# Altium PCB PCB2.PcbDoc
Units mm, origin at the board's own origin, x right, y up, seen from the top; angles counter-clockwise.
Board outline 347.66 x 123.82 mm, 2 copper layers (Top Layer, Bottom Layer), stack 1.671 mm thick; 182 components, 114 nets, 863 pads, 116 vias.
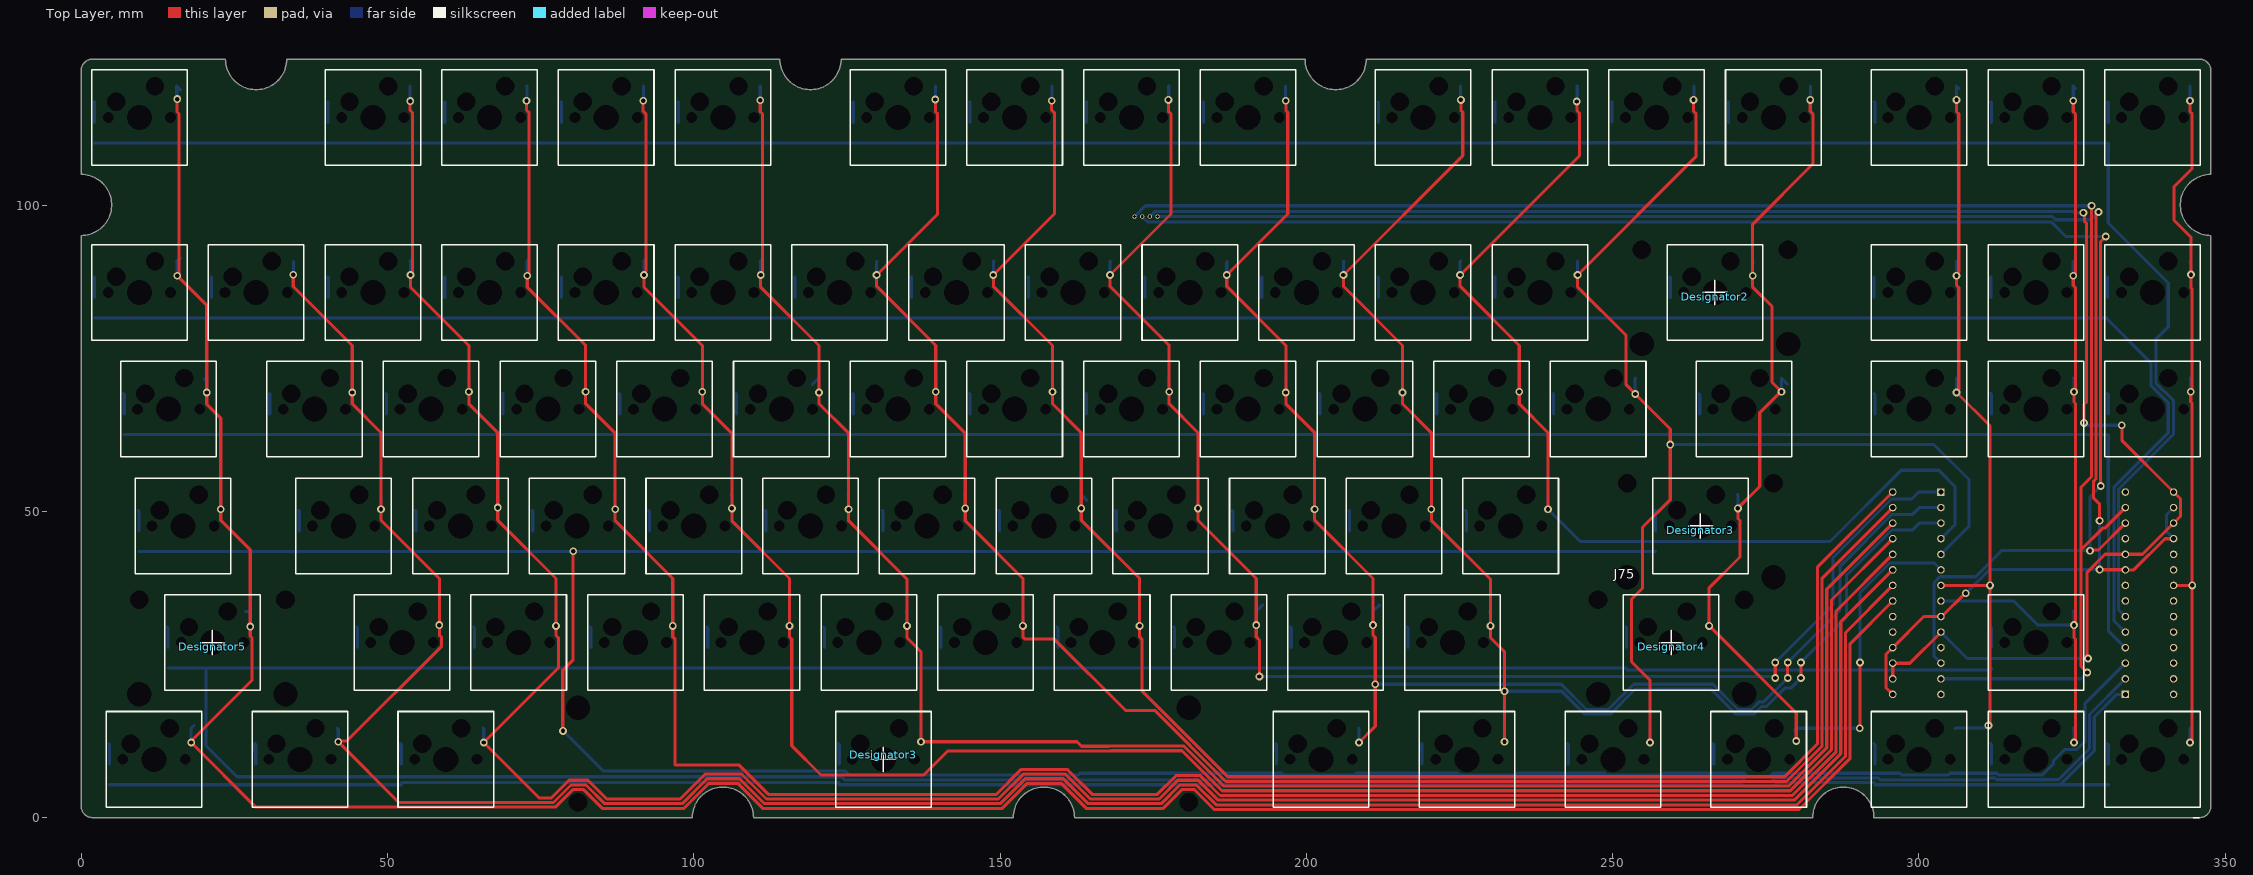
[diagram p0: Top Layer view]
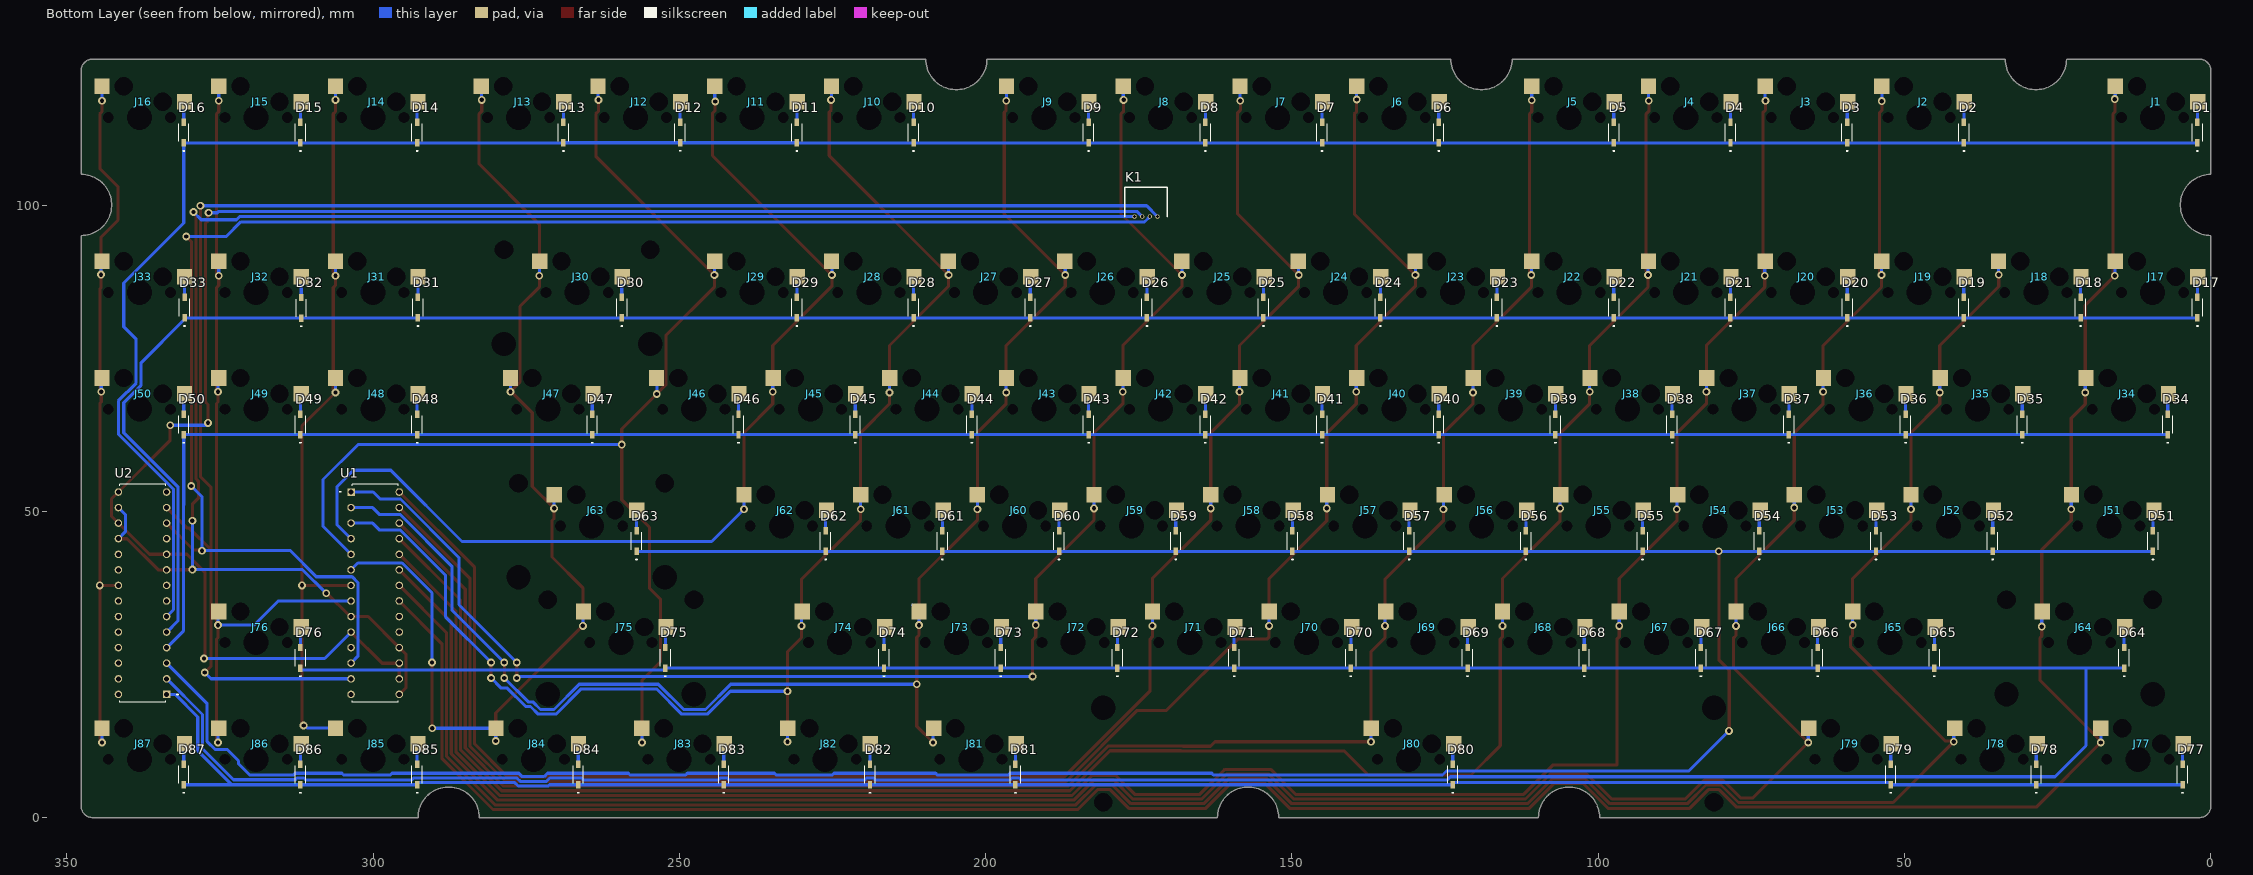
[diagram p1: Bottom Layer view, seen from below]
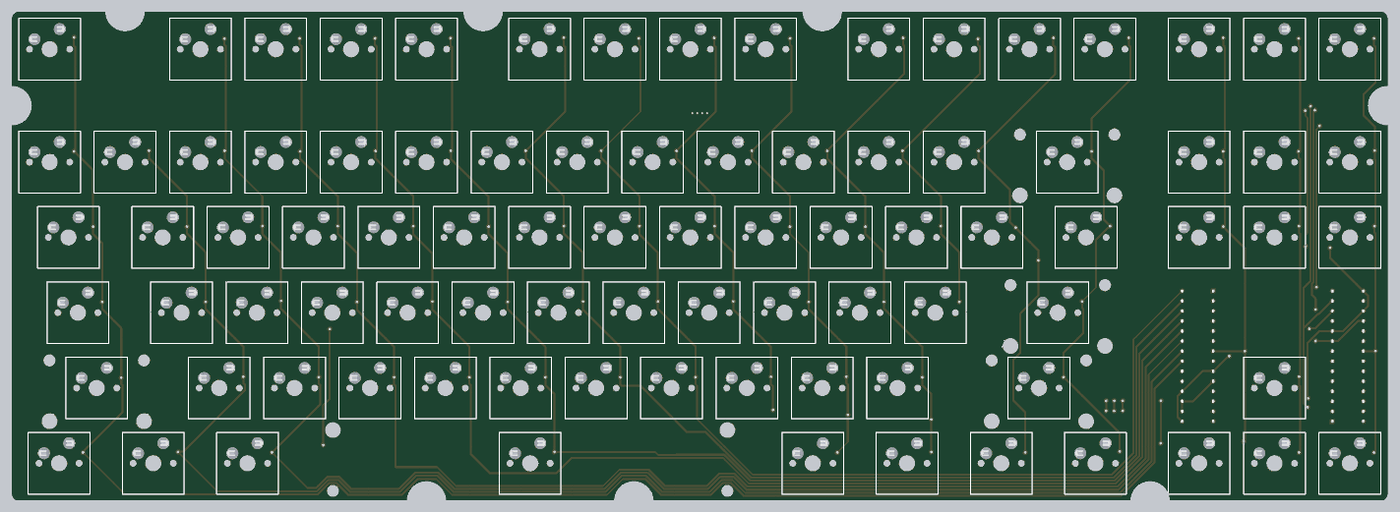
[diagram p2: 3D render of the assembled board from above, using the file's embedded part models]
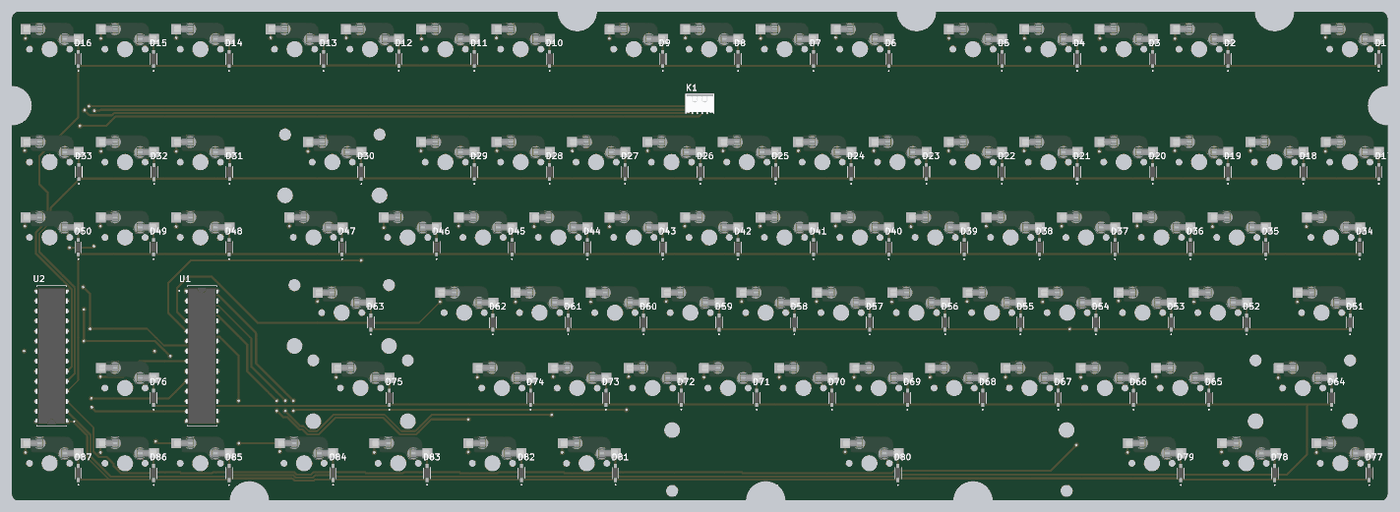
[diagram p3: 3D render of the assembled board from below, using the file's embedded part models]

## Layer stack, top to bottom
Top Solder: solder mask 0.0102, Solder Resist, Dk 3.5
Top Layer: signal copper 0.0356
Dielectric 1: dielectric 1.6, FR-4, Dk 4.8
Bottom Layer: signal copper 0.0356
Bottom Solder: solder mask 0.0102, Solder Resist, Dk 3.5

## Board outline
0,1.905 ccw(c1.905,1.905) 1.905,0 99.775,0 cw(c104.775,0) 109.775,0 152.162,0 cw(c157.162,0) 162.163,0 282.655,0 cw(c287.655,0) 292.655,0 345.757,0 ccw(c345.757,1.905) 347.662,1.905 347.662,95.012 cw(c347.662,100.013) 347.662,105.013 347.662,121.92 ccw(c345.757,121.92) 345.757,123.825 209.788,123.825 cw(c204.788,123.825) 199.787,123.825 124.063,123.825 cw(c119.062,123.825) 114.062,123.825 33.575,123.825 cw(c28.575,123.825) 23.575,123.825 1.905,123.825 ccw(c1.905,121.92) 0,121.92 0,105.013 cw(c0,100.013) 0,95.012

## Design rules (kind name [scope] priority, off if disabled: settings)
Clearance [All] p1: gap=0.254 ignorepadtopadclearanceinfootprint=FALSE except(0: Arc-Hole Track-Hole SMDPad-Hole THPad-Hole Via-Hole Fill-Hole Poly-Hole Region-Hole Text-Hole)
HoleSize [All] p1: absolutevalues=TRUE maxlimit=5 minlimit=0.025 maxpercent=80.000 minpercent=20.000
PolygonConnect [All] p1: connectstyle=Relief reliefconductorwidth=0.254 reliefentries=4 polygonreliefangle="90 Angle" airgapwidth=0.254
RoutingVias [All] p1: holewidth=0.3 width=0.6 viastyle="Through Hole" minholewidth=0.3 minwidth=0.6 maxholewidth=0.3 maxwidth=0.6
SolderMaskExpansion [All] p1: expansion=0.102 istentingtop=TRUE
Width [All] p1: maxlimit=0.762 minlimit=0.152 preferedwidth=0.508
29 further rules are at their usual default settings.

## Components (designator, comment, footprint, x,y, rotation, side; value= is the part's Value field where it differs from the comment)
D1 "1N5819HW-7-F" SOD3715X145N 2.222,111.823 r90 bottom
D2 "1N5819HW-7-F" SOD3715X145N 40.322,111.823 r90 bottom
D3 "1N5819HW-7-F" SOD3715X145N 59.372,111.823 r90 bottom
D4 "1N5819HW-7-F" SOD3715X145N 78.422,111.823 r90 bottom
D5 "1N5819HW-7-F" SOD3715X145N 97.472,111.823 r90 bottom
D6 "1N5819HW-7-F" SOD3715X145N 126.047,111.823 r90 bottom
D7 "1N5819HW-7-F" SOD3715X145N 145.097,111.823 r90 bottom
D8 "1N5819HW-7-F" SOD3715X145N 164.147,111.823 r90 bottom
D9 "1N5819HW-7-F" SOD3715X145N 183.197,111.823 r90 bottom
D10 "1N5819HW-7-F" SOD3715X145N 211.772,111.823 r90 bottom
D11 "1N5819HW-7-F" SOD3715X145N 230.822,111.823 r90 bottom
D12 "1N5819HW-7-F" SOD3715X145N 249.872,111.852 r90 bottom
D13 "1N5819HW-7-F" SOD3715X145N 268.922,111.823 r90 bottom
D14 "1N5819HW-7-F" SOD3715X145N 292.798,111.823 r90 bottom
D15 "1N5819HW-7-F" SOD3715X145N 311.848,111.823 r90 bottom
D16 "1N5819HW-7-F" SOD3715X145N 330.898,111.823 r90 bottom
D17 "1N5819HW-7-F" SOD3715X145N 2.202,83.248 r90 bottom
D18 "1N5819HW-7-F" SOD3715X145N 21.272,83.248 r90 bottom
D19 "1N5819HW-7-F" SOD3715X145N 40.354,83.248 r90 bottom
D20 "1N5819HW-7-F" SOD3715X145N 59.358,83.248 r90 bottom
D21 "1N5819HW-7-F" SOD3715X145N 78.432,83.248 r90 bottom
D22 "1N5819HW-7-F" SOD3715X145N 97.472,83.248 r90 bottom
D23 "1N5819HW-7-F" SOD3715X145N 116.561,83.248 r90 bottom
D24 "1N5819HW-7-F" SOD3715X145N 135.579,83.248 r90 bottom
D25 "1N5819HW-7-F" SOD3715X145N 154.665,83.248 r90 bottom
D26 "1N5819HW-7-F" SOD3715X145N 173.672,83.248 r90 bottom
D27 "1N5819HW-7-F" SOD3715X145N 192.722,83.248 r90 bottom
D28 "1N5819HW-7-F" SOD3715X145N 211.772,83.248 r90 bottom
D29 "1N5819HW-7-F" SOD3715X145N 230.822,83.248 r90 bottom
D30 "1N5819HW-7-F" SOD3715X145N 259.397,83.248 r90 bottom
D31 "1N5819HW-7-F" SOD3715X145N 292.671,83.248 r90 bottom
D32 "1N5819HW-7-F" SOD3715X145N 311.721,83.219 r90 bottom
D33 "1N5819HW-7-F" SOD3715X145N 330.771,83.248 r90 bottom
D34 "1N5819HW-7-F" SOD3715X145N 7.048,64.198 r90 bottom
D35 "1N5819HW-7-F" SOD3715X145N 30.797,64.198 r90 bottom
D36 "1N5819HW-7-F" SOD3715X145N 49.847,64.198 r90 bottom
D37 "1N5819HW-7-F" SOD3715X145N 68.897,64.198 r90 bottom
D38 "1N5819HW-7-F" SOD3715X145N 87.947,64.198 r90 bottom
D39 "1N5819HW-7-F" SOD3715X145N 106.997,64.198 r90 bottom
D40 "1N5819HW-7-F" SOD3715X145N 126.047,64.198 r90 bottom
D41 "1N5819HW-7-F" SOD3715X145N 145.097,64.198 r90 bottom
D42 "1N5819HW-7-F" SOD3715X145N 164.147,64.198 r90 bottom
D43 "1N5819HW-7-F" SOD3715X145N 183.197,64.198 r90 bottom
D44 "1N5819HW-7-F" SOD3715X145N 202.247,64.198 r90 bottom
D45 "1N5819HW-7-F" SOD3715X145N 221.297,64.198 r90 bottom
D46 "1N5819HW-7-F" SOD3715X145N 240.347,64.198 r90 bottom
D47 "1N5819HW-7-F" SOD3715X145N 264.223,64.198 r90 bottom
D48 "1N5819HW-7-F" SOD3715X145N 292.798,64.198 r90 bottom
D49 "1N5819HW-7-F" SOD3715X145N 311.848,64.198 r90 bottom
D50 "1N5819HW-7-F" SOD3715X145N 330.898,64.198 r90 bottom
D51 "1N5819HW-7-F" SOD3715X145N 9.461,45.148 r90 bottom
D52 "1N5819HW-7-F" SOD3715X145N 35.623,45.148 r90 bottom
D53 "1N5819HW-7-F" SOD3715X145N 54.673,45.148 r90 bottom
D54 "1N5819HW-7-F" SOD3715X145N 73.723,45.148 r90 bottom
D55 "1N5819HW-7-F" SOD3715X145N 92.773,45.148 r90 bottom
D56 "1N5819HW-7-F" SOD3715X145N 111.823,45.148 r90 bottom
D57 "1N5819HW-7-F" SOD3715X145N 130.873,45.148 r90 bottom
D58 "1N5819HW-7-F" SOD3715X145N 149.923,45.148 r90 bottom
D59 "1N5819HW-7-F" SOD3715X145N 168.973,45.148 r90 bottom
D60 "1N5819HW-7-F" SOD3715X145N 188.023,45.148 r90 bottom
D61 "1N5819HW-7-F" SOD3715X145N 207.073,45.148 r90 bottom
D62 "1N5819HW-7-F" SOD3715X145N 226.123,45.148 r90 bottom
D63 "1N5819HW-7-F" SOD3715X145N 256.984,45.148 r90 bottom
D64 "1N5819HW-7-F" SOD3715X145N 14.16,26.098 r90 bottom
D65 "1N5819HW-7-F" SOD3715X145N 45.148,26.098 r90 bottom
D66 "1N5819HW-7-F" SOD3715X145N 64.198,26.098 r90 bottom
D67 "1N5819HW-7-F" SOD3715X145N 83.248,26.098 r90 bottom
D68 "1N5819HW-7-F" SOD3715X145N 102.298,26.098 r90 bottom
D69 "1N5819HW-7-F" SOD3715X145N 121.348,26.098 r90 bottom
D70 "1N5819HW-7-F" SOD3715X145N 140.398,26.098 r90 bottom
D71 "1N5819HW-7-F" SOD3715X145N 159.448,26.098 r90 bottom
D72 "1N5819HW-7-F" SOD3715X145N 178.498,26.098 r90 bottom
D73 "1N5819HW-7-F" SOD3715X145N 197.548,26.098 r90 bottom
D74 "1N5819HW-7-F" SOD3715X145N 216.598,26.098 r90 bottom
D75 "1N5819HW-7-F" SOD3715X145N 252.285,26.098 r90 bottom
D76 "1N5819HW-7-F" SOD3715X145N 311.848,26.098 r90 bottom
D77 "1N5819HW-7-F" SOD3715X145N 4.635,7.048 r90 bottom
D78 "1N5819HW-7-F" SOD3715X145N 28.511,7.048 r90 bottom
D79 "1N5819HW-7-F" SOD3715X145N 52.26,7.048 r90 bottom
D80 "1N5819HW-7-F" SOD3715X145N 123.761,7.048 r90 bottom
D81 "1N5819HW-7-F" SOD3715X145N 195.135,7.048 r90 bottom
D82 "1N5819HW-7-F" SOD3715X145N 218.884,7.048 r90 bottom
D83 "1N5819HW-7-F" SOD3715X145N 242.76,7.048 r90 bottom
D84 "1N5819HW-7-F" SOD3715X145N 266.509,7.048 r90 bottom
D85 "1N5819HW-7-F" SOD3715X145N 292.798,7.048 r90 bottom
D86 "1N5819HW-7-F" SOD3715X145N 311.848,7.048 r90 bottom
D87 "1N5819HW-7-F" SOD3715X145N 330.898,7.048 r90 bottom
Designator2 "Comment" space_bar_stab 266.7,85.725 r0 top
Designator3 "Comment" SPACE_STAB 130.969,9.525 r180 top
Designator3 "Comment" space_bar_stab 264.319,47.625 r0 top
Designator4 "Comment" space_bar_stab 259.556,28.575 r0 top
Designator5 "Comment" space_bar_stab 21.431,28.575 r0 top
J1 "Socket" SOCKET 9.525,114.3 r0 top
J2 "Socket" SOCKET 47.625,114.3 r0 top
J3 "Socket" SOCKET 66.675,114.3 r0 top
J4 "Socket" SOCKET 85.725,114.3 r0 top
J5 "Socket" SOCKET 104.775,114.3 r0 top
J6 "Socket" SOCKET 133.35,114.3 r0 top
J7 "Socket" SOCKET 152.4,114.3 r0 top
J8 "Socket" SOCKET 171.45,114.3 r0 top
J9 "Socket" SOCKET 190.5,114.3 r0 top
J10 "Socket" SOCKET 219.075,114.3 r0 top
J11 "Socket" SOCKET 238.125,114.3 r0 top
J12 "Socket" SOCKET 257.175,114.3 r0 top
J13 "Socket" SOCKET 276.225,114.3 r0 top
J14 "Socket" SOCKET 300.037,114.3 r0 top
J15 "Socket" SOCKET 319.087,114.3 r0 top
J16 "Socket" SOCKET 338.137,114.3 r0 top
J17 "Socket" SOCKET 9.525,85.725 r0 top
J18 "Socket" SOCKET 28.575,85.725 r0 top
J19 "Socket" SOCKET 47.625,85.725 r0 top
J20 "Socket" SOCKET 66.675,85.725 r0 top
J21 "Socket" SOCKET 85.725,85.725 r0 top
J22 "Socket" SOCKET 104.775,85.725 r0 top
J23 "Socket" SOCKET 123.825,85.725 r0 top
J24 "Socket" SOCKET 142.875,85.725 r0 top
J25 "Socket" SOCKET 161.925,85.725 r0 top
J26 "Socket" SOCKET 180.975,85.725 r0 top
J27 "Socket" SOCKET 200.025,85.725 r0 top
J28 "Socket" SOCKET 219.075,85.725 r0 top
J29 "Socket" SOCKET 238.125,85.725 r0 top
J30 "Socket" SOCKET 266.7,85.725 r0 top
J31 "Socket" SOCKET 300.037,85.725 r0 top
J32 "Socket" SOCKET 319.087,85.725 r0 top
J33 "Socket" SOCKET 338.137,85.725 r0 top
J34 "Socket" SOCKET 14.287,66.675 r0 top
J35 "Socket" SOCKET 38.1,66.675 r0 top
J36 "Socket" SOCKET 57.15,66.675 r0 top
J37 "Socket" SOCKET 76.2,66.675 r0 top
J38 "Socket" SOCKET 95.25,66.675 r0 top
J39 "Socket" SOCKET 114.3,66.675 r0 top
J40 "Socket" SOCKET 133.35,66.675 r0 top
J41 "Socket" SOCKET 152.4,66.675 r0 top
J42 "Socket" SOCKET 171.45,66.675 r0 top
J43 "Socket" SOCKET 190.5,66.675 r0 top
J44 "Socket" SOCKET 209.55,66.675 r0 top
J45 "Socket" SOCKET 228.6,66.675 r0 top
J46 "Socket" SOCKET 247.65,66.675 r0 top
J47 "Socket" SOCKET 271.462,66.675 r0 top
J48 "Socket" SOCKET 300.037,66.675 r0 top
J49 "Socket" SOCKET 319.087,66.675 r0 top
J50 "Socket" SOCKET 338.137,66.675 r0 top
J51 "Socket" SOCKET 16.669,47.625 r0 top
J52 "Socket" SOCKET 42.862,47.625 r0 top
J53 "Socket" SOCKET 61.912,47.625 r0 top
J54 "Socket" SOCKET 80.962,47.625 r0 top
J55 "Socket" SOCKET 100.012,47.625 r0 top
J56 "Socket" SOCKET 119.062,47.625 r0 top
J57 "Socket" SOCKET 138.112,47.625 r0 top
J58 "Socket" SOCKET 157.162,47.625 r0 top
J59 "Socket" SOCKET 176.212,47.625 r0 top
J60 "Socket" SOCKET 195.262,47.625 r0 top
J61 "Socket" SOCKET 214.312,47.625 r0 top
J62 "Socket" SOCKET 233.362,47.625 r0 top
J63 "Socket" SOCKET 264.319,47.625 r0 top
J64 "Socket" SOCKET 21.431,28.575 r0 top
J65 "Socket" SOCKET 52.387,28.575 r0 top
J66 "Socket" SOCKET 71.437,28.575 r0 top
J67 "Socket" SOCKET 90.487,28.575 r0 top
J68 "Socket" SOCKET 109.537,28.575 r0 top
J69 "Socket" SOCKET 128.587,28.575 r0 top
J70 "Socket" SOCKET 147.637,28.575 r0 top
J71 "Socket" SOCKET 166.687,28.575 r0 top
J72 "Socket" SOCKET 185.737,28.575 r0 top
J73 "Socket" SOCKET 204.787,28.575 r0 top
J74 "Socket" SOCKET 223.837,28.575 r0 top
J75 "Socket" SOCKET 259.556,28.575 r0 top
J76 "Socket" SOCKET 319.087,28.575 r0 top
J77 "Socket" SOCKET 11.906,9.525 r0 top
J78 "Socket" SOCKET 35.719,9.525 r0 top
J79 "Socket" SOCKET 59.531,9.525 r0 top
J80 "Socket" SOCKET 130.969,9.525 r0 top
J81 "Socket" SOCKET 202.406,9.525 r0 top
J82 "Socket" SOCKET 226.219,9.525 r0 top
J83 "Socket" SOCKET 250.031,9.525 r0 top
J84 "Socket" SOCKET 273.844,9.525 r0 top
J85 "Socket" SOCKET 300.037,9.525 r0 top
J86 "Socket" SOCKET 319.087,9.525 r0 top
J87 "Socket" SOCKET 338.137,9.525 r0 top
K1 "JST 1.25mm" JST 173.831,98.108 r180 bottom (schematic designator *)
U1 "MCP23017-E/SP" DIP787W45P254L3556H508Q28 299.658,36.639 r180 bottom
U2 "MCP23017-E/SP" DIP787W45P254L3556H508Q28 337.627,36.639 r0 bottom

## Footprints (in the part's own frame and the unit in brackets; to place one, negate y for a bottom-side part, rotate by r counter-clockwise, add the part's x,y. Pads: shape width x height; smd on the part's side, far side on the other; paste and mask are expansions set on the pad)
DIP787W45P254L3556H508Q28 [mm]
  rect 1.23x1.23 / inner round 1.23 / far side rect 1.23x1.23 hole 0.82: 1(-3.935,16.51)
  round 1.23 hole 0.82: 2(-3.935,13.97) 3(-3.935,11.43) 4(-3.935,8.89) 5(-3.935,6.35) 6(-3.935,3.81) 7(-3.935,1.27) 8(-3.935,-1.27) 9(-3.935,-3.81) 10(-3.935,-6.35) 11(-3.935,-8.89) 12(-3.935,-11.43) 13(-3.935,-13.97) 14(-3.935,-16.51) 15(3.935,-16.51) 16(3.935,-13.97) 17(3.935,-11.43) 18(3.935,-8.89) 19(3.935,-6.35) 20(3.935,-3.81) 21(3.935,-1.27) 22(3.935,1.27) 23(3.935,3.81) 24(3.935,6.35) 25(3.935,8.89) 26(3.935,11.43) 27(3.935,13.97) 28(3.935,16.51)
  silkscreen extent -5.81,-17.78 3.75,17.78, body extent -4.06,-17.34 4.06,17.34, height 5.08
JST [mm]
  round 0.7 hole 0.45: 1(-1.875,0) 2(-0.625,0) 3(0.625,0) 4(1.875,0)
  silkscreen extent -3.5,0 3.5,4.8, body extent -3.37,-0.15 3.37,4.34, height 3.33
SOCKET [mm]
  round 0 hole 1.753: 0(-5.08,0) 0(5.08,0)
  round 0 hole 3: 0(-3.81,2.54) ""(2.54,5.08)
  rect 2.5x2.55 smd far side: 1(-7.371,2.54) 2(6.096,5.08)
  round 0 hole 4.089: ""(0,0)
  silkscreen extent -7.8,-7.8 7.8,7.8, body extent -7.91,0.89 6.59,6.78, height 1.85
SOD3715X145N [mm]
  rect 1.21x0.73 smd: A(1.68,0) C(-1.68,0)
  silkscreen extent -3.1,-0.85 1.43,0.85, body extent -1.83,-0.77 1.83,0.77, height 0.8
space_bar_stab [mil]
  round 0 hole 157: 16(-470,-331.3) 16(470,-331.3)
  round 0 hole 120: ""(-470,275) ""(470,275)
  silkscreen extent -79,-79 79,79
SPACE_STAB [mil]
  round 0 hole 120: 17(-1962.5,275) 17(1962.5,275)
  round 0 hole 157: 18(-1962.5,-331.3) 18(1962.5,-331.3)
  silkscreen extent -79,-79 79,79

## Part data
D1 D2 D3 D4 D5 D6 D7 D8 D9 D10 D11 D12 D13 D14 D15 D16 D17 D18 D19 D20 D21 D22 D23 D24 D25 D26 D27 D28 D29 D30 D31 D32 D33 D34 D35 D36 D37 D38 D39 D40 D41 D42 D43 D44 D45 D46 D47 D48 D49 D50 D51 D52 D53 D54 D55 D56 D57 D58 D59 D60 D61 D62 D63 D64 D65 D66 D67 D68 D69 D70 D71 D72 D73 D74 D75 D76 D77 D78 D79 D80 D81 D82 D83 D84 D85 D86 D87: "Diode Schottky 40 V 1A Surface Mount SOD-123", Package="SOD-123 Fairchild Semiconductor", Availability="In Stock", Check_prices=https://www.snapeda.com/parts/1N5819HW-7-F/Diodes+Inc./view-part/?ref=eda, MF="Diodes Inc.", MP=1N5819HW-7-F, Price=None, Purchase-URL=https://pricing.snapeda.com/search/part/1N5819HW-7-F/?ref=eda, SnapEDA_Link=https://www.snapeda.com/parts/1N5819HW-7-F/Diodes+Inc./view-part/?ref=snap
J1 J2 J3 J4 J5 J6 J7 J8 J9 J10 J11 J12 J13 J14 J15 J16 J17 J18 J19 J20 J21 J22 J23 J24 J25 J26 J27 J28 J29 J30 J31 J32 J33 J34 J35 J36 J37 J38 J39 J40 J41 J42 J43 J44 J45 J46 J47 J48 J49 J50 J51 J52 J53 J54 J55 J56 J57 J58 J59 J60 J61 J62 J63 J64 J65 J66 J67 J68 J69 J70 J71 J72 J73 J74 J75 J76 J77 J78 J79 J80 J81 J82 J83 J84 J85 J86 J87: library part CPG151101S11, "Kailh hotswap socket"
U1 U2: "I/O Expander 16 IÂ²C 1.7 MHz 28-SPDIP", Package="DIP-28 Microchip", Availability="In Stock", Check_prices=https://www.snapeda.com/parts/MCP23017-E/SP/Microchip/view-part/?ref=eda, MF=Microchip, MP=MCP23017-E/SP, Price=None, Purchase-URL=https://pricing.snapeda.com/search/part/MCP23017-E/SP/?ref=eda, SnapEDA_Link=https://www.snapeda.com/parts/MCP23017-E/SP/Microchip/view-part/?ref=snap

## Via types
v1: diameter 1.27, hole 0.711, Top Layer to Bottom Layer, tented both sides, 116 vias

## Nets (pads, with @x,y where several pads share a name; then routed paths per layer and width w, separated by ;. In a path a pad name is that pad's centre, name@x,y a point inside that pad or via, vN(x,y) a via of type N, cw(c..) or ccw(c..) an arc to the next point about the centre after c; other vN are vias at no path point)
Net*_1: K1.1 U1.9 U1.15 U1.18 U2.9 U2.16 U2.18 | length 280.6
  Top Layer w0.508: U1.15 294.6,21.252 294.6,26.626 U1.18 300.803,32.829 U1.9 303.72,32.829 307.53,36.639 v1(307.657,36.639) ; v1@329.133,98.654 328.905,98.425 328.905,55.296 328.524,54.915 328.524,52.118 329.489,51.153 v1(329.489,48.463) ; v1(329.489,40.488) 329.508,40.469 333.673,40.469 U2.9 335.087,40.449 340.167,45.529 U2.18
  Bottom Layer w0.508: K1.1 321.791,98.108 322.3,97.598 328.052,97.598 v1(329.311,98.857) ; v1(307.657,36.639) 311.506,40.488 v1(329.489,40.488) v1@329.489,48.158 ; U2.18 340.439,46.652 340.439,49.486 U2.16
Net*_2: K1.2 U1.10 U1.16 U1.17 U2.10 U2.15 U2.17 | length 284.2
  Top Layer w0.508: U1.16 U1.17 298.513,25.209 U1.10 ; v1(326.847,98.741) 326.993,98.595 326.993,97.365 327.381,96.977 327.381,67.869 326.949,67.437 v1(326.949,64.44) ; v1(327.596,25.971) 327.457,26.111 327.457,40.072 330.374,42.989 U2.10 336.482,42.989 U2.17 342.685,49.192 342.685,52.026 U2.15 333.121,61.591 v1(333.121,64.059)
  Bottom Layer w0.508: K1.2 175.314,98.966 325.196,98.966 325.421,98.741 v1(326.847,98.741) ; U1.10 307.911,25.971 v1(327.596,25.971) ; v1(326.949,64.44) 327.33,64.059 v1(333.121,64.059)
Net*_3: K1.3 U1.12 U2.12 | length 259.9
  Top Layer w0.508: v1(327.914,43.561) 328.041,43.688 329.311,43.688 U2.12 ; v1(329.667,54.127) 329.667,93.904 329.667,94.056 v1(330.479,94.869)
  Bottom Layer w0.508: K1.3 174.006,97.307 174.043,97.307 174.101,97.249 321.571,97.249 323.952,94.869 v1(330.479,94.869) ; U1.12 302.47,26.332 302.47,38.375 303.422,39.326 309.267,39.326 313.565,43.624 327.851,43.624 v1(327.914,43.561) 327.914,52.375 v1(329.667,54.127)
Net*_4: K1.4 U1.13 U2.13 | length 268.7
  Top Layer w0.508: v1(327.469,23.685) 326.453,24.701 326.453,43.717 ; v1(328.185,99.884) 328.143,99.841 328.143,55.611 326.453,53.922 326.453,43.717 ; U2.13 330.336,47.253 329.989,47.253 326.453,43.717
  Bottom Layer w0.508: K1.4 173.733,99.884 v1(328.185,99.884) ; U1.13 326.453,22.669 v1(327.469,23.685)
NetD1_A: D1.A J1.1 | length 3.6
  Bottom Layer w0.508: J1.1@2.154,116.613 J1.1 2.222,116.771 D1.A
NetD1_C: D1.C D2.C D3.C D4.C D5.C D6.C D7.C D8.C D9.C D10.C D11.C D12.C D13.C D14.C D15.C D16.C U2.6 | length 416.3
  Bottom Layer w0.508: D1.C D2.C D3.C D4.C D5.C D6.C D7.C D8.C D9.C D10.C D11.C 230.837,110.158 249.858,110.158 D12.C 249.887,110.158 268.908,110.158 D13.C D14.C D15.C D16.C 330.898,97.066 340.69,87.274 340.69,80.124 338.669,78.103 338.669,70.923 341.566,68.026 341.566,62.612 332.569,53.615 332.569,33.952 U2.6
NetD2_A: D2.A J2.1 | length 3.4
  Bottom Layer w0.508: J2.1 40.322,116.771 D2.A
NetD3_A: D3.A J3.1 | length 3.4
  Bottom Layer w0.508: J3.1 59.372,116.771 D3.A
NetD4_A: D4.A J4.1 | length 3.4
  Bottom Layer w0.508: J4.1 78.422,116.771 D4.A
NetD5_A: D5.A J5.1 | length 3.4
  Bottom Layer w0.508: J5.1 97.472,116.771 D5.A
NetD6_A: D6.A J6.1 | length 3.4
  Bottom Layer w0.508: J6.1 126.047,116.771 D6.A
NetD7_A: D7.A J7.1 | length 3.4
  Bottom Layer w0.508: J7.1 145.097,116.771 D7.A
NetD8_A: D8.A J8.1 | length 3.4
  Bottom Layer w0.508: J8.1 164.147,116.771 D8.A
NetD9_A: D9.A J9.1 | length 3.4
  Bottom Layer w0.508: J9.1 183.197,116.771 D9.A
NetD10_A: D10.A J10.1 | length 3.4
  Bottom Layer w0.508: J10.1 211.772,116.771 D10.A
NetD11_A: D11.A J11.1 | length 3.4
  Bottom Layer w0.508: J11.1 230.822,116.771 D11.A
NetD12_A: D12.A J12.1 | length 3.3
  Bottom Layer w0.508: J12.1 249.872,116.771 D12.A
NetD13_A: D13.A J13.1 | length 3.4
  Bottom Layer w0.508: J13.1 268.922,116.771 D13.A
NetD14_A: D14.A J14.1 | length 3.4
  Bottom Layer w0.508: J14.1 292.798,116.708 D14.A
NetD15_A: D15.A J15.1 | length 3.4
  Bottom Layer w0.508: J15.1 311.848,116.708 D15.A
NetD16_A: D16.A J16.1 | length 3.4
  Bottom Layer w0.508: J16.1 330.898,116.708 D16.A
NetD17_A: D17.A J17.1 | length 3.4
  Bottom Layer w0.508: J17.1 2.202,88.217 D17.A
NetD17_C: D17.C D18.C D19.C D20.C D21.C D22.C D23.C D24.C D25.C D26.C D27.C D28.C D29.C D30.C D31.C D32.C D33.C U2.5 | length 388.4
  Bottom Layer w0.508: D17.C D18.C D19.C D20.C D21.C D22.C D23.C D24.C D25.C D26.C D27.C D28.C D29.C D30.C D31.C 292.686,81.554 311.707,81.554 D32.C 311.736,81.554 330.757,81.554 D33.C 330.771,81.328 337.907,74.192 337.907,70.515 340.69,67.732 340.69,62.813 331.807,53.93 331.807,32.174 U2.5
NetD18_A: D18.A J18.1 | length 3.4
  Bottom Layer w0.508: J18.1 21.272,88.196 D18.A
NetD19_A: D19.A J19.1 | length 3.4
  Bottom Layer w0.508: J19.1 40.354,88.165 D19.A
NetD20_A: D20.A J20.1 | length 3.4
  Bottom Layer w0.508: J20.1 59.358,88.211 D20.A
NetD21_A: D21.A J21.1 | length 3.4
  Bottom Layer w0.508: J21.1 78.432,88.187 D21.A
NetD22_A: D22.A J22.1 | length 3.4
  Bottom Layer w0.508: J22.1 97.472,88.196 D22.A
NetD23_A: D23.A J23.1 | length 3.4
  Bottom Layer w0.508: J23.1 116.561,88.158 D23.A
NetD24_A: D24.A J24.1 | length 3.4
  Bottom Layer w0.508: J24.1 135.579,88.19 D24.A
NetD25_A: D25.A J25.1 | length 3.4
  Bottom Layer w0.508: J25.1 154.665,88.154 D25.A
NetD26_A: D26.A J26.1 | length 3.4
  Bottom Layer w0.508: J26.1 173.672,88.196 D26.A
NetD27_A: D27.A J27.1 | length 3.4
  Bottom Layer w0.508: J27.1 192.722,88.196 D27.A
NetD28_A: D28.A J28.1 | length 3.4
  Bottom Layer w0.508: J28.1 211.772,88.196 D28.A
NetD29_A: D29.A J29.1 | length 3.4
  Bottom Layer w0.508: J29.1 230.822,88.196 D29.A
NetD30_A: D30.A J30.1 | length 3.4
  Bottom Layer w0.508: J30.1 259.397,88.196 D30.A
NetD31_A: D31.A J31.1 | length 3.3
  Bottom Layer w0.508: J31.1 292.671,88.26 D31.A
NetD32_A: D32.A J32.1 | length 3.4
  Bottom Layer w0.508: J32.1 311.721,88.26 D32.A
NetD33_A: D33.A J33.1 | length 3.3
  Bottom Layer w0.508: J33.1 330.771,88.26 D33.A
NetD34_A: D34.A J34.1 | length 3.4
  Bottom Layer w0.508: J34.1 7.048,69.083 D34.A
NetD34_C: D34.C D35.C D36.C D37.C D38.C D39.C D40.C D41.C D42.C D43.C D44.C D45.C D46.C D47.C D48.C D49.C D50.C U2.4 | length 359.8
  Bottom Layer w0.508: D34.C D35.C D36.C D37.C D38.C D39.C D40.C D41.C D42.C D43.C D44.C D45.C D46.C D47.C D48.C D49.C D50.C 330.898,51.058 330.911,51.045 330.911,30.531 U2.4
NetD35_A: D35.A J35.1 | length 3.4
  Bottom Layer w0.508: J35.1 30.797,69.146 D35.A
NetD36_A: D36.A J36.1 | length 3.4
  Bottom Layer w0.508: J36.1 49.847,69.146 D36.A
NetD37_A: D37.A J37.1 | length 3.4
  Bottom Layer w0.508: J37.1 68.897,69.146 D37.A
NetD38_A: D38.A J38.1 | length 3.4
  Bottom Layer w0.508: J38.1 87.947,69.146 D38.A
NetD39_A: D39.A J39.1 | length 3.4
  Bottom Layer w0.508: J39.1 106.997,69.146 D39.A
NetD40_A: D40.A J40.1 | length 3.4
  Bottom Layer w0.508: J40.1 126.047,69.146 D40.A
NetD41_A: D41.A J41.1 | length 3.4
  Bottom Layer w0.508: J41.1 145.097,69.146 D41.A
NetD42_A: D42.A J42.1 | length 3.4
  Bottom Layer w0.508: J42.1 164.147,69.146 D42.A
NetD43_A: D43.A J43.1 | length 3.4
  Bottom Layer w0.508: J43.1 183.197,69.146 D43.A
NetD44_A: D44.A J44.1 | length 3.4
  Bottom Layer w0.508: J44.1 202.247,69.146 D44.A
NetD45_A: D45.A J45.1 | length 3.4
  Bottom Layer w0.508: J45.1 221.297,69.146 D45.A
NetD46_A: D46.A J46.1 | length 3.4
  Bottom Layer w0.508: J46.1 240.347,69.146 D46.A
NetD47_A: D47.A J47.1 | length 3.4
  Bottom Layer w0.508: J47.1 264.223,69.083 D47.A
NetD48_A: D48.A J48.1 | length 3.4
  Bottom Layer w0.508: J48.1 292.798,69.083 D48.A
NetD49_A: D49.A J49.1 | length 3.4
  Bottom Layer w0.508: J49.1 311.848,69.083 D49.A
NetD50_A: D50.A J50.1 | length 3.4
  Bottom Layer w0.508: J50.1 330.898,69.083 D50.A
NetD51_A: D51.A J51.1 | length 3.4
  Bottom Layer w0.508: J51.1 9.461,50.001 D51.A
NetD51_C: D51.C D52.C D53.C D54.C D55.C D56.C D57.C D58.C D59.C D60.C D61.C D62.C D63.C U2.3 | length 548.6
  Top Layer w0.508: v1(78.676,14.16) 78.619,14.218 78.619,24.075 80.327,25.783 v1(80.327,43.497)
  Bottom Layer w0.508: D51.C D52.C D53.C D54.C D55.C D56.C D57.C D58.C D59.C D60.C D61.C D62.C D63.C ; v1(78.676,14.16) 85.217,7.62 123.182,7.62 123.186,7.615 124.337,7.615 124.341,7.62 124.777,7.62 125.425,6.972 162.833,6.972 163.105,7.243 196.027,7.243 196.298,6.972 207.901,6.972 208.172,7.243 224.75,7.243 225.021,6.972 234.201,6.972 234.472,7.243 248.703,7.243 248.974,6.972 258.052,6.972 258.323,7.243 271.522,7.243 272.078,6.687 275.673,6.687 276.225,7.239 286.303,7.239 286.308,7.243 296.894,7.243 297.166,6.972 304.817,6.972 305.088,7.243 312.74,7.243 313.011,6.972 320.145,6.972 321.958,8.785 321.958,9.273 323.797,11.112 325.784,11.112 327.088,12.417 327.088,18.605 U2.3
NetD52_A: D52.A J52.1 | length 3.4
  Bottom Layer w0.508: J52.1 35.623,50.033 D52.A
NetD53_A: D53.A J53.1 | length 3.4
  Bottom Layer w0.508: J53.1 54.673,50.033 D53.A
NetD54_A: D54.A J54.1 | length 3.4
  Bottom Layer w0.508: J54.1 73.723,50.033 D54.A
NetD55_A: D55.A J55.1 | length 3.4
  Bottom Layer w0.508: J55.1 92.773,50.033 D55.A
NetD56_A: D56.A J56.1 | length 3.4
  Bottom Layer w0.508: J56.1 111.823,50.033 D56.A
NetD57_A: D57.A J57.1 | length 3.4
  Bottom Layer w0.508: J57.1 130.873,50.033 D57.A
NetD58_A: D58.A J58.1 | length 3.4
  Bottom Layer w0.508: J58.1 149.923,50.033 D58.A
NetD59_A: D59.A J59.1 | length 3.4
  Bottom Layer w0.508: J59.1 168.973,50.033 D59.A
NetD60_A: D60.A J60.1 | length 3.4
  Bottom Layer w0.508: J60.1 188.023,50.033 D60.A
NetD61_A: D61.A J61.1 | length 3.4
  Bottom Layer w0.508: J61.1 207.073,50.033 D61.A
NetD62_A: D62.A J62.1 | length 3.4
  Bottom Layer w0.508: J62.1 226.123,50.033 D62.A
NetD63_A: D63.A J63.1 | length 3.4
  Bottom Layer w0.508: J63.1 256.984,50.128 D63.A
NetD64_A: D64.A J64.1 | length 3.4
  Bottom Layer w0.508: J64.1 14.16,31.015 D64.A
NetD64_C: D64.C D65.C D66.C D67.C D68.C D69.C D70.C D71.C D72.C D73.C D74.C D75.C D76.C U2.2 | length 638.5
  Bottom Layer w0.508: D64.C 20.383,24.418 ; D76.C 311.848,24.197 311.737,24.086 252.396,24.086 252.285,24.197 D75.C D74.C D73.C D72.C D71.C D70.C D69.C D68.C D67.C D66.C D65.C 20.383,24.418 ; U2.2 327.85,16.827 327.85,11.25 322.784,6.184 312.721,6.184 312.424,6.481 311.273,6.481 310.922,6.13 293.725,6.13 293.374,6.481 292.223,6.481 292.219,6.477 276.541,6.477 275.989,5.925 271.697,5.925 271.141,6.481 265.934,6.481 265.583,6.13 243.687,6.13 243.336,6.481 242.185,6.481 241.834,6.13 219.811,6.13 219.46,6.481 218.309,6.481 217.958,6.13 196.062,6.13 195.711,6.481 194.56,6.481 194.209,6.13 124.688,6.13 124.151,6.667 25.463,6.667 20.383,11.747 20.383,24.418
NetD65_A: D65.A J65.1 | length 3.4
  Bottom Layer w0.508: J65.1 45.148,30.983 D65.A
NetD66_A: D66.A J66.1 | length 3.4
  Bottom Layer w0.508: J66.1 64.198,30.983 D66.A
NetD67_A: D67.A J67.1 | length 3.4
  Bottom Layer w0.508: J67.1 83.248,30.983 D67.A
NetD68_A: D68.A J68.1 | length 3.4
  Bottom Layer w0.508: J68.1 102.298,30.983 D68.A
NetD69_A: D69.A J69.1 | length 3.4
  Bottom Layer w0.508: J69.1 121.348,30.983 D69.A
NetD70_A: D70.A J70.1 | length 3.4
  Bottom Layer w0.508: J70.1 140.398,30.983 D70.A
NetD71_A: D71.A J71.1 | length 3.4
  Bottom Layer w0.508: J71.1 159.448,30.983 D71.A
NetD72_A: D72.A J72.1 | length 3.4
  Bottom Layer w0.508: J72.1 178.498,30.983 D72.A
NetD73_A: D73.A J73.1 | length 3.4
  Bottom Layer w0.508: J73.1 197.548,30.983 D73.A
NetD74_A: D74.A J74.1 | length 3.4
  Bottom Layer w0.508: J74.1 216.598,30.983 D74.A
NetD75_A: D75.A J75.1 | length 3.4
  Bottom Layer w0.508: J75.1 252.285,31.015 D75.A
NetD76_A: D76.A J76.1 | length 3.4
  Bottom Layer w0.508: J76.1 311.848,30.983 D76.A
NetD77_A: D77.A J77.1 | length 3.4
  Bottom Layer w0.508: J77.1 4.635,11.965 D77.A
NetD77_C: D77.C D78.C D79.C D80.C D81.C D82.C D83.C D84.C D85.C D86.C D87.C U2.1 | length 347.4
  Bottom Layer w0.508: D77.C D78.C D79.C 52.26,5.604 52.371,5.715 123.65,5.715 123.761,5.604 D80.C D81.C D82.C D83.C D84.C 271.176,5.368 271.381,5.163 276.305,5.163 276.856,5.715 292.687,5.715 292.798,5.604 D85.C D86.C 323.046,5.368 ; D87.C 323.046,5.368 ; U2.1 332.315,20.129 328.612,16.426 328.612,10.935 323.046,5.368
NetD78_A: D78.A J78.1 | length 4.5
  Bottom Layer w0.508: J78.1@28.348,10.978 J78.1 28.511,11.901 D78.A
NetD79_A: D79.A J79.1 | length 4.5
  Bottom Layer w0.508: J79.1@52.16,10.978 J79.1 52.26,11.965 D79.A
NetD80_A: D80.A J80.1 | length 3.4
  Bottom Layer w0.508: J80.1 123.761,11.901 D80.A
NetD81_A: D81.A J81.1 | length 4.5
  Bottom Layer w0.508: J81.1@195.035,10.978 J81.1 195.135,11.965 D81.A
NetD82_A: D82.A J82.1 | length 4.4
  Bottom Layer w0.508: J82.1@218.848,10.978 J82.1 218.884,12.028 D82.A
NetD83_A: D83.A J83.1 | length 3.4
  Bottom Layer w0.508: J83.1 242.76,11.965 D83.A
NetD84_A: D84.A J84.1 | length 3.4
  Bottom Layer w0.508: J84.1 266.509,12.028 D84.A
NetD85_A: D85.A J85.1 | length 3.4
  Bottom Layer w0.508: J85.1 292.798,11.933 D85.A
NetD86_A: D86.A J86.1 | length 3.4
  Bottom Layer w0.508: J86.1 311.848,11.933 D86.A
NetD87_A: D87.A J87.1 | length 3.4
  Bottom Layer w0.508: J87.1 330.898,11.933 D87.A
NetJ1_2: J1.2 J17.2 J34.2 J51.2 J64.2 J77.2 U1.21 | length 450.3
  Top Layer w0.508: v1(15.684,117.284) 15.684,115.178 15.989,114.873 15.989,88.76 v1(15.684,88.455) 20.51,83.629 v1(20.51,69.405) 20.51,67.49 22.796,65.204 v1@22.796,50.609 ; v1(17.97,12.255) 28.511,1.714 77.422,1.714 80.28,4.572 82.042,4.572 85.09,1.524 98.425,1.524 102.489,5.588 107.188,5.588 111.252,1.524 150.368,1.524 154.432,5.588 160.02,5.588 164.084,1.524 176.625,1.524 179.673,4.572 181.737,4.572 184.975,1.333 280.414,1.333 288.762,9.681 288.762,28.408 U1.21 ; v1@17.97,12.509 27.896,22.435 27.896,29.35 27.622,29.623 v1(27.622,31.178) 27.622,43.709 22.796,48.535 v1(22.796,50.355)
  Bottom Layer w0.508: v1(15.684,88.455) 15.684,90.741 J17.2 J17.2@16.192,91.376 ; v1(15.684,117.284) 15.621,117.348 J1.2 J1.2@16.192,118.808 ; v1(17.97,12.255) 17.97,14.573 J77.2 J77.2@18.447,15.049 ; J34.2@20.193,71.564 J34.2 20.51,71.628 v1(20.51,69.405) ; J51.2 22.796,52.673 v1(22.796,50.355) ; J64.2@26.811,33.655 J64.2 27.622,33.56 v1(27.622,31.178)
NetJ2_2: J2.2 J19.2 J36.2 J53.2 J66.2 J79.2 U1.23 | length 408
  Top Layer w0.508: v1(53.721,116.967) 53.721,115.428 54.089,115.06 54.089,88.887 v1(53.784,88.582) 53.784,86.603 63.309,77.078 v1(63.309,69.532) 63.309,67.553 68.008,62.854 v1(68.008,50.609) 68.008,48.567 77.533,39.042 v1(77.533,31.305) 77.533,29.735 77.902,29.366 77.902,24.435 v1(65.722,12.255) 74.739,3.238 76.791,3.238 79.648,6.096 82.739,6.096 85.787,3.048 97.794,3.048 101.858,7.112 107.819,7.112 108.042,6.89 111.883,3.048 149.737,3.048 153.801,7.112 160.651,7.112 160.874,6.89 164.715,3.048 175.994,3.048 179.042,6.096 182.368,6.096 185.607,2.857 279.652,2.857 287.238,10.443 287.238,31.964 U1.23
  Bottom Layer w0.508: J2.2 v1(53.721,116.967) v1@53.784,116.903 ; v1(53.784,88.582) 53.784,90.741 J19.2 J19.2@54.038,91.122 ; J36.2@63.246,71.73 J36.2 63.309,71.691 v1(63.309,69.532) ; J79.2 65.722,14.51 v1(65.722,12.255) ; v1(68.008,50.609) J53.2 ; v1(77.533,31.305) J66.2
NetJ3_2: J3.2 J20.2 J37.2 J54.2 J67.2 U1.24 | length 366.6
  Top Layer w0.508: v1(72.707,117.03) 72.707,115.491 73.139,115.06 73.139,89.014 v1@72.834,88.709 ; v1(72.834,88.455) 72.834,86.603 82.359,77.078 v1(82.359,69.532) 82.359,67.553 87.185,62.727 v1@87.185,50.609 ; v1(87.185,50.355) 87.185,48.44 96.583,39.042 v1(96.583,31.305) 96.583,29.517 96.964,29.136 96.964,8.572 107.436,8.572 112.199,3.81 149.421,3.81 153.485,7.874 160.967,7.874 161.189,7.652 165.031,3.81 175.678,3.81 178.726,6.858 182.684,6.858 185.922,3.619 279.336,3.619 286.476,10.759 286.476,33.742 U1.24
  Bottom Layer w0.508: v1@72.707,117.284 72.771,117.348 J3.2 ; v1(72.834,88.455) 72.834,90.741 J20.2 J20.2@73.025,91.059 ; J37.2 82.296,71.73 82.359,71.666 v1(82.359,69.532) ; J54.2@87.058,52.68 J54.2 87.185,52.578 v1(87.185,50.355) ; v1(96.583,31.305) J67.2
NetJ4_2: J4.2 J21.2 J38.2 J55.2 J68.2 U1.25 | length 344.5
  Top Layer w0.508: v1(91.757,117.03) 91.757,115.305 92.189,114.873 92.189,89.141 v1@91.884,88.836 ; v1(91.884,88.582) 91.884,86.603 101.409,77.078 v1(101.409,69.532) 101.409,67.553 106.235,62.727 v1(106.235,50.482) 106.235,48.44 115.633,39.042 v1(115.633,31.305) 115.633,29.517 116.014,29.136 116.014,11.747 120.79,6.972 137.528,6.972 141.445,10.889 168.081,10.889 168.113,10.922 179.697,10.922 186.238,4.381 279.021,4.381 285.714,11.074 285.714,35.52 U1.25
  Bottom Layer w0.508: J4.2 91.821,117.348 v1@91.884,117.284 ; v1(91.884,88.582) 91.884,90.741 J21.2 J21.2@92.189,91.173 ; J38.2 101.346,71.73 101.409,71.666 v1(101.409,69.532) ; J55.2@106.108,52.68 J55.2 106.235,52.578 v1(106.235,50.482) ; v1(115.633,31.305) J68.2
NetJ5_2: J5.2 J22.2 J39.2 J56.2 J69.2 J80.2 U1.26 | length 326.1
  Top Layer w0.508: v1(110.871,117.094) 110.871,115.242 111.239,114.873 111.239,89.141 v1@110.934,88.836 ; v1(110.934,88.582) 110.934,86.603 120.459,77.078 v1(120.459,69.405) 120.459,67.553 125.285,62.727 v1@125.285,50.609 ; v1(125.285,50.355) 125.285,48.44 134.81,38.915 v1(134.81,31.305) 134.81,29.39 137.096,27.104 v1(137.096,12.382) 162.573,12.382 163.304,11.651 167.765,11.651 167.797,11.684 180.013,11.684 186.554,5.143 278.705,5.143 284.952,11.39 284.952,37.298 U1.26
  Bottom Layer w0.508: J5.2 v1(110.871,117.094) v1@110.934,117.03 ; v1(110.934,88.582) 110.934,90.741 J22.2 J22.2@111.315,91.249 ; J39.2@119.4,70.734 119.4,70.759 J39.2 120.459,71.691 v1(120.459,69.405) ; J56.2@125.158,52.68 J56.2 125.285,52.578 v1(125.285,50.355) ; J69.2 134.683,33.63 134.81,33.503 v1(134.81,31.305) ; J80.2@137.065,14.58 J80.2 137.096,14.573 v1(137.096,12.382)
NetJ6_2: J6.2 J23.2 J40.2 J57.2 J70.2 U1.27 | length 299.4
  Top Layer w0.508: v1(139.446,117.221) 139.446,115.242 139.814,114.873 139.814,98.539 v1(129.857,88.582) 129.857,86.73 139.509,77.078 v1(139.509,69.532) 139.509,67.553 144.335,62.727 v1(144.335,50.482) 144.335,48.44 153.733,39.042 v1@153.733,31.559 ; v1(153.733,31.305) 153.733,29.517 154.114,29.136 158.877,29.136 170.492,17.521 175.254,17.521 186.869,5.905 278.39,5.905 284.19,11.706 284.19,39.076 U1.27
  Bottom Layer w0.508: v1(129.857,88.582) 129.857,90.741 J23.2 ; J40.2@139.446,71.73 J40.2 139.509,71.691 v1(139.509,69.532) ; J6.2 v1(139.446,117.221) v1@139.509,117.157 ; J57.2@144.208,52.68 J57.2 144.335,52.578 v1(144.335,50.482) ; v1(153.733,31.305) J70.2
NetJ7_2: J7.2 J24.2 J41.2 J58.2 J71.2 U1.28 | length 286.9
  Top Layer w0.508: v1(158.432,117.03) 158.432,115.491 158.864,115.06 158.864,98.539 v1(148.907,88.582) 148.907,86.73 158.559,77.078 v1@158.559,69.786 ; v1(158.559,69.532) 158.559,67.553 163.258,62.854 v1@163.258,50.736 ; v1(163.258,50.482) 163.258,48.567 172.783,39.042 v1@172.783,31.559 ; v1(172.783,31.305) 172.783,29.517 173.164,29.136 173.164,20.688 187.185,6.667 278.074,6.667 283.428,12.021 283.428,40.854 U1.28
  Bottom Layer w0.508: v1(148.907,88.582) 148.907,90.766 J24.2@148.971,90.83 ; v1@158.432,117.284 158.496,117.348 J7.2 ; J41.2 158.496,71.73 158.559,71.666 v1(158.559,69.532) ; v1(163.258,50.482) J58.2 J58.2@164.147,51.816 ; v1(172.783,31.305) J71.2
NetJ8_2: J8.2 J25.2 J42.2 J59.2 J72.2 U1.1 | length 250.9
  Top Layer w0.508: v1(177.482,117.157) 177.482,115.305 177.914,114.873 177.914,98.539 v1(167.957,88.582) 167.957,86.73 177.609,77.078 v1(177.609,69.532) 177.609,67.553 182.308,62.854 v1(182.308,50.482) 182.308,48.567 191.833,39.042 v1(191.833,31.432) 191.833,29.517 192.341,29.009 v1(192.341,23.05) ; v1(276.542,22.796) v1(276.542,25.336)
  Bottom Layer w0.508: v1(167.957,88.582) 167.957,90.741 J25.2 ; v1(177.482,117.157) 177.546,117.221 J8.2 ; J42.2 177.546,71.73 177.609,71.666 v1(177.609,69.532) ; v1(182.308,50.482) J59.2 ; v1(191.833,31.432) J72.2 191.833,33.68 J72.2@192.829,34.676 ; v1(192.341,23.05) v1@276.542,23.05 ; v1(276.542,25.336) 285.973,34.767 285.973,42.447 295.532,52.006 298.841,52.006 299.984,53.149 U1.1
NetJ9_2: J9.2 J26.2 J43.2 J60.2 J73.2 J81.2 U1.2 | length 251.6
  Top Layer w0.508: v1(196.659,69.405) 196.659,67.553 201.358,62.854 v1@201.358,50.609 ; v1@196.659,69.659 196.659,77.078 187.007,86.73 v1(187.007,88.582) 196.964,98.539 196.964,115.123 196.659,115.428 v1(196.659,117.03) ; v1(201.358,50.355) 201.358,48.567 210.883,39.042 v1(210.883,31.432) 210.883,29.798 211.252,29.43 211.252,14.91 v1(208.597,12.255) ; v1(278.574,22.796) v1(278.574,25.336)
  Bottom Layer w0.508: v1(187.007,88.582) 187.007,90.716 187.071,90.78 J26.2 ; J43.2 196.596,71.73 196.659,71.666 v1(196.659,69.405) ; J9.2 196.596,117.348 v1@196.659,117.284 ; v1(201.358,50.355) J60.2 ; J81.2@208.502,14.58 J81.2 208.597,14.51 v1(208.597,12.255) ; v1(210.883,31.432) J73.2 210.883,33.68 211.879,34.676 J73.2@211.904,34.676 ; v1(211.264,21.78) 241.617,21.78 245.74,17.658 249.306,17.658 253.428,21.78 266.336,21.78 270.458,17.658 272.674,17.658 273.915,18.899 274.677,18.899 v1(278.574,22.796) ; v1(278.574,25.336) 287.126,33.888 287.126,41.06 295.532,49.466 298.924,49.466 300.067,50.609 U1.2
NetJ10_2: J10.2 J27.2 J44.2 J61.2 J74.2 J82.2 U1.3 | length 231.9
  Top Layer w0.508: v1(220.408,50.355) 220.408,48.567 230.06,38.915 v1@230.06,31.559 ; v1@220.408,50.609 220.408,62.854 215.709,67.553 v1(215.709,69.405) 215.709,77.078 206.057,86.73 v1(206.057,88.582) 225.539,108.064 225.539,115.187 225.234,115.491 v1(225.234,117.157) ; v1(230.06,31.305) 230.06,29.39 232.346,27.104 v1(232.346,20.637) v1(232.346,12.382) ; v1(280.733,22.796) v1(280.733,25.336)
  Bottom Layer w0.508: v1(206.057,88.582) 206.057,90.741 J27.2 ; J44.2 215.709,71.691 v1(215.709,69.405) ; v1(220.408,50.355) J61.2 ; v1@225.171,116.967 J10.2 ; J74.2 J74.2@230.06,33.528 ; v1(230.06,31.305) J74.2@230.06,33.503 ; J82.2 232.346,14.573 v1(232.346,12.382) ; v1(232.346,20.637) 241.683,20.637 245.424,16.896 249.622,16.896 253.744,21.018 266.02,21.018 270.142,16.896 273.055,16.896 274.296,18.137 275.068,18.137 278.077,21.145 279.082,21.145 v1(280.733,22.796) ; v1(280.733,25.336) 288.206,32.809 288.206,39.6 295.532,46.926 298.924,46.926 300.067,48.069 U1.3
NetJ11_2: J11.2 J28.2 J45.2 J62.2 U1.4 | length 173.9
  Top Layer w0.508: v1@239.458,50.609 239.458,62.854 234.759,67.553 v1(234.759,69.532) 234.759,77.078 225.107,86.73 v1(225.107,88.582) 244.589,108.064 244.589,114.996 244.157,115.428 v1(244.157,116.903)
  Bottom Layer w0.508: v1(225.107,88.582) 225.107,90.741 J28.2 J28.2@225.171,90.83 ; J45.2 234.696,71.73 234.759,71.666 v1(234.759,69.532) ; J62.2 v1(239.458,50.355) 244.742,45.072 285.483,45.072 297.116,56.705 303.212,56.705 305.879,54.038 305.879,47.815 U1.4 ; v1(244.157,116.903) 244.221,116.967 J11.2
NetJ12_2: J12.2 J29.2 J46.2 J83.2 U1.5 | length 198
  Top Layer w0.508: v1(256.095,12.255) 256.095,22.453 253.092,25.457 253.092,35.654 254.883,37.445 254.883,47.379 259.397,51.893 v1(259.397,60.896) 259.397,63.436 v1(253.682,69.151) 252.198,70.636 252.198,78.69 244.284,86.603 v1(244.284,88.582) 263.639,107.937 263.639,114.873 263.207,115.305 v1(263.207,117.157)
  Bottom Layer w0.508: J29.2 244.221,90.78 244.284,90.716 v1(244.284,88.582) ; v1(253.682,69.151) 253.682,71.691 J46.2 J46.2@253.746,71.73 ; v1(256.095,12.255) 256.095,14.573 J83.2 J83.2@256.127,14.58 ; v1(259.397,60.896) 302.469,60.896 308.165,55.2 308.165,47.561 U1.5 ; v1(263.207,117.157) 263.271,117.221 J12.2
NetJ13_2: J13.2 J30.2 J47.2 J63.2 J75.2 J84.2 U1.6 | length 184.5
  Top Layer w0.508: v1(265.747,31.305) 279.971,17.081 v1(279.971,12.509) ; v1@265.747,31.559 265.747,37.51 270.783,42.545 270.783,48.496 270.446,48.832 v1(270.446,50.482) 274.015,54.051 274.015,66.105 277.442,69.532 v1(277.558,69.532) 276.01,71.08 276.01,83.452 272.859,86.603 v1(272.859,88.455) ; v1@272.859,88.709 272.859,96.877 282.689,106.706 282.689,114.873 282.257,115.305 v1(282.257,117.157) ; v1(290.334,14.593) 290.36,14.618 290.36,25.311 v1(290.385,25.336)
  Bottom Layer w0.508: J75.2@265.652,33.68 J75.2 265.747,33.56 v1(265.747,31.305) ; J63.2 270.446,52.673 v1(270.446,50.482) ; v1(272.859,88.455) 272.859,90.5 J30.2@272.98,90.621 ; v1(277.558,69.532) J47.2 J47.2@278.554,70.759 ; v1(279.971,12.509) 279.971,13.884 279.805,14.05 279.805,14.471 J84.2 279.952,14.593 v1(290.334,14.593) ; J13.2 282.321,117.348 v1@282.384,117.284 ; v1(290.385,25.336) 290.385,36.7 295.258,41.572 302.47,41.572 U1.6
NetJ14_2: J14.2 J31.2 J48.2 J85.2 U1.7 | length 126.5
  Top Layer w0.508: U1.7 v1(311.594,37.909) ; v1(306.133,88.455) 306.133,86.885 306.502,86.516 306.502,69.774 v1(306.133,69.405) 311.594,63.944 v1(311.594,37.909) ; v1@306.133,88.709 306.502,89.078 306.502,114.873 306.133,115.242 v1(306.133,117.157) ; v1@311.594,14.922 v1(311.594,37.909)
  Bottom Layer w0.508: J85.2@305.879,14.541 305.943,14.605 J85.2 310.69,14.605 311.134,15.049 v1(311.34,15.049) ; v1(306.133,69.405) J48.2 J48.2@306.502,71.387 ; v1(306.133,88.455) J31.2 ; v1(306.133,117.157) J14.2 J14.2@306.502,119.012
NetJ15_2: J15.2 J32.2 J49.2 J76.2 J86.2 U1.8 | length 140.8
  Top Layer w0.508: v1(325.183,117.03) 325.183,115.242 325.552,114.873 325.552,88.824 v1(325.183,88.455) 325.183,86.885 325.552,86.516 325.552,69.774 v1(325.31,69.532) 325.31,67.835 325.552,67.593 325.552,31.928 v1@325.31,31.686 ; v1@325.31,12.509 325.552,12.751 325.552,29.148 325.31,29.39 v1(325.31,31.432)
  Bottom Layer w0.508: U1.8 315.492,35.369 319.429,31.432 v1(325.31,31.432) 325.31,33.553 J76.2@325.196,33.667 ; J86.2 325.31,14.478 v1(325.31,12.255) ; J49.2 325.31,71.628 v1(325.31,69.532) ; v1(325.183,88.455) J32.2 ; v1(325.183,117.03) J15.2 J15.2@325.564,118.999
NetJ16_2: J16.2 J33.2 J50.2 J87.2 U2.21 | length 119.4
  Top Layer w0.508: U2.21 v1@344.602,37.909 ; v1(344.233,12.255) 344.602,12.624 v1@344.602,37.909 ; v1(344.233,117.03) 344.233,115.242 344.602,114.873 344.602,105.969 341.63,102.997 341.63,97.536 344.418,94.748 v1(344.418,88.64) 344.418,86.483 344.602,86.298 v1@344.602,70.028 ; v1(344.36,69.532) 344.36,67.835 344.602,67.593 v1@344.602,37.909 ; v1(344.614,37.909) v1@344.602,37.909
  Bottom Layer w0.508: v1(344.233,12.255) J87.2 ; J50.2 344.36,71.628 v1(344.36,69.532) ; J33.2 344.418,90.621 v1(344.418,88.64) ; v1(344.233,117.03) J16.2
NetJ18_2: J18.2 J35.2 J52.2 J65.2 J78.2 U1.22 | length 401.5
  Top Layer w0.508: v1(34.639,88.614) 34.639,86.698 44.259,77.078 v1(44.259,69.405) 44.259,67.553 48.958,62.854 v1@48.958,50.609 ; v1(48.958,50.355) 48.958,48.567 58.483,39.042 v1(58.483,31.432) 58.483,29.798 58.852,29.43 58.852,28.002 43.37,12.52 42.111,12.52 v1(41.973,12.382) 51.879,2.476 77.106,2.476 79.964,5.334 82.423,5.334 85.471,2.286 98.109,2.286 102.173,6.35 107.504,6.35 107.726,6.128 111.568,2.286 150.052,2.286 154.116,6.35 160.336,6.35 164.4,2.286 176.31,2.286 179.358,5.334 182.053,5.334 185.291,2.095 280.098,2.095 288,9.997 288,30.186 U1.22
  Bottom Layer w0.508: v1@34.607,88.582 v1(34.639,88.614) 34.671,88.646 J18.2 ; J78.2@41.815,14.58 41.973,14.421 v1(41.973,12.382) ; J35.2@44.196,71.73 J35.2 44.259,71.691 v1(44.259,69.405) ; v1(48.958,50.355) J52.2 ; v1(58.483,31.432) J65.2
pads on no net: Designator2. Designator2.16 Designator3. Designator3.16 Designator3.17 Designator3.18 Designator4. Designator4.16 Designator5. Designator5.16 J1. J1.0 J2. J2.0 J3. J3.0 J4. J4.0 J5. J5.0 J6. J6.0 J7. J7.0 J8. J8.0 J9. J9.0 J10. J10.0 J11. J11.0 J12. J12.0 J13. J13.0 J14. J14.0 J15. J15.0 J16. J16.0 J17. J17.0 J18. J18.0 J19. J19.0 J20. J20.0 J21. J21.0 J22. J22.0 J23. J23.0 J24. J24.0 J25. J25.0 J26. J26.0 J27. J27.0 J28. J28.0 J29. J29.0 J30. J30.0 J31. J31.0 J32. J32.0 J33. J33.0 J34. J34.0 J35. J35.0 J36. J36.0 J37. J37.0 J38. J38.0 J39. J39.0 J40. J40.0 J41. J41.0 J42. J42.0 J43. J43.0 J44. J44.0 J45. J45.0 J46. J46.0 J47. J47.0 J48. J48.0 J49. J49.0 J50. J50.0 J51. J51.0 J52. J52.0 J53. J53.0 J54. J54.0 J55. J55.0 J56. J56.0 J57. J57.0 J58. J58.0 J59. J59.0 J60. J60.0 J61. J61.0 J62. J62.0 J63. J63.0 J64. J64.0 J65. J65.0 J66. J66.0 J67. J67.0 J68. J68.0 J69. J69.0 J70. J70.0 J71. J71.0 J72. J72.0 J73. J73.0 J74. J74.0 J75. J75.0 J76. J76.0 J77. J77.0 J78. J78.0 J79. J79.0 J80. J80.0 J81. J81.0 J82. J82.0 J83. J83.0 J84. J84.0 J85. J85.0 J86. J86.0 J87. J87.0 U1.11 U1.14 U1.19 U1.20 U2.7 U2.8 U2.11 U2.14 U2.19 U2.20 U2.22 U2.23 U2.24 U2.25 U2.26 U2.27 U2.28

## Silkscreen, mask and mechanical layers (free items; w line width, h text height)
Top Overlay:
  lines w0.254: 344.805,0 345.757,0